# Altium PCB PCB - Rectangular.PcbDoc (part 2 of 2)
Units mm, origin at the board's own origin, x right, y up, seen from the top; angles counter-clockwise.
Board outline 0.38 x 0.39 mm, 6 copper layers (Top Layer, Layer 1, Layer 3, Layer 4, Layer 2, Bottom Layer), stack 1.211 mm thick; 158 components, 103 nets, 435 pads, 0 vias.
Unrouted connection lines stored in the file: 282.
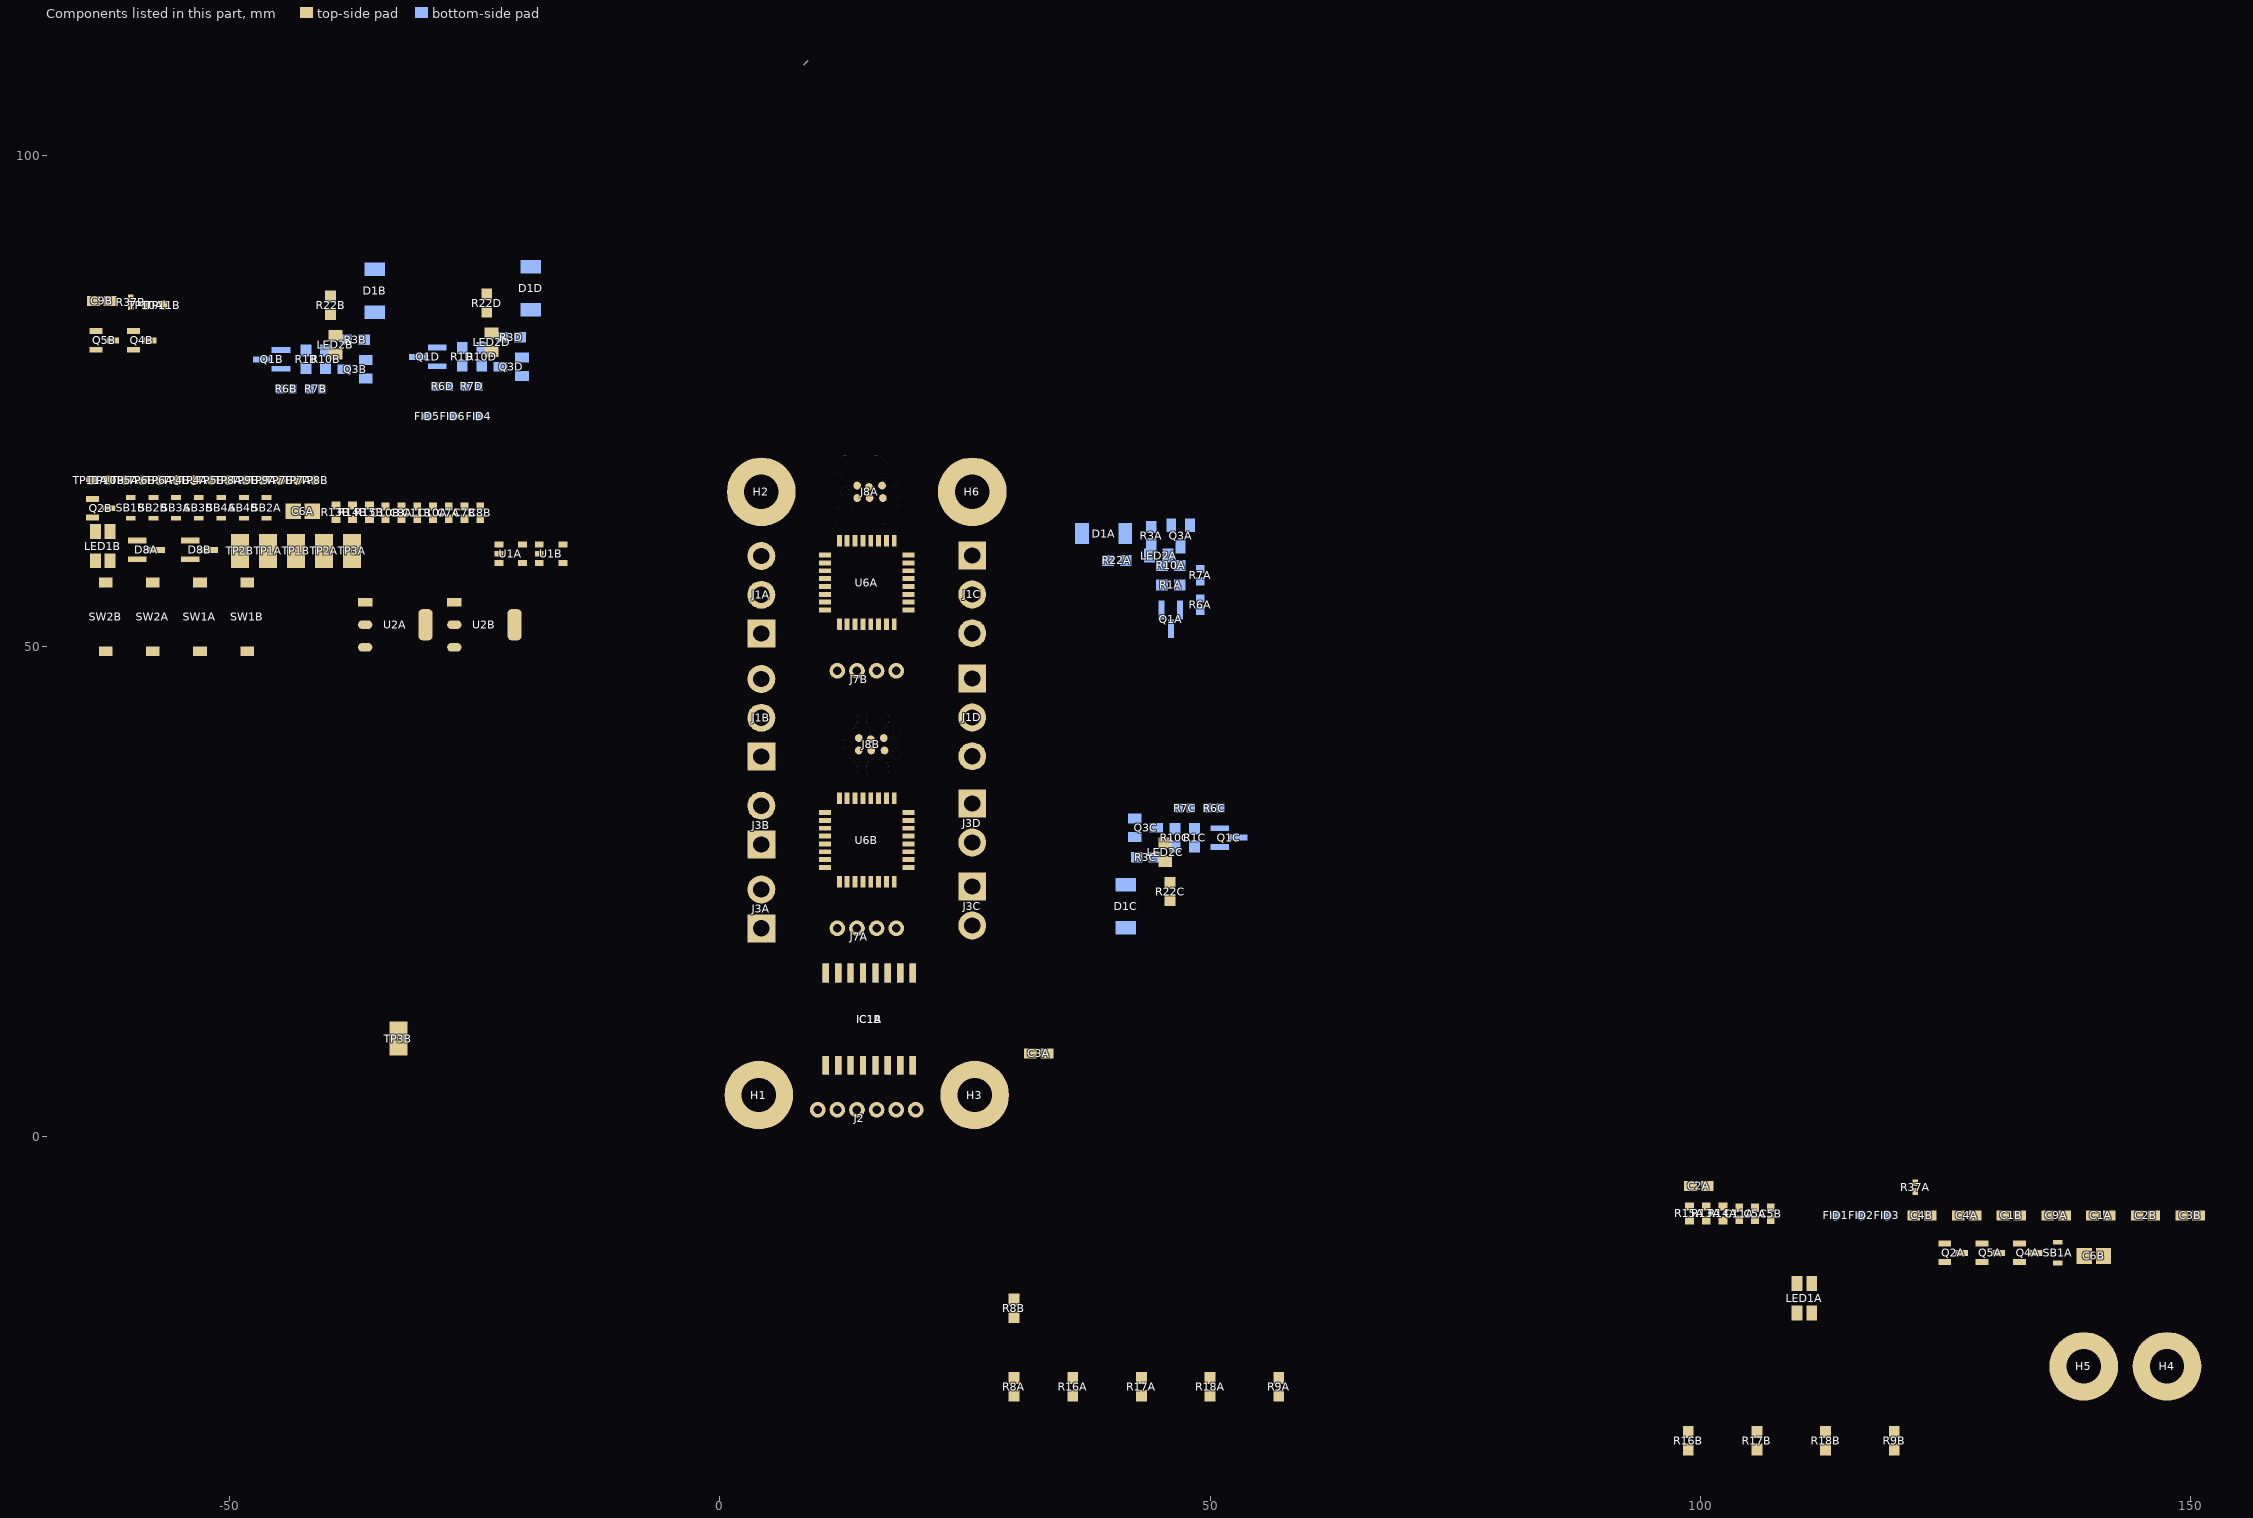
[diagram p2: the components of this part, seen from the top]

## Nets (pads, with @x,y where several pads share a name; then routed paths per layer and width w, separated by ;. In a path a pad name is that pad's centre, name@x,y a point inside that pad or via, vN(x,y) a via of type N, cw(c..) or ccw(c..) an arc to the next point about the centre after c; other vN are vias at no path point) (continued)
copper on no net: | length 159
  Top Layer w1: 74.875,83.525 78.563,82.555 ; 75.7,91.075 80.025,90.85
  Top Layer w2: 42.871,83.088 42.57,83.182 cw(c42.944,84.379) 42.547,83.189 42.265,83.283 cw(c42.661,84.473) 42.229,83.296 41.485,83.569 cw(c41.917,84.746) 41.464,83.577 41.002,83.756 cw(c41.455,84.925) 40.973,83.768 40.521,83.956 cw(c41.003,85.114) 40.509,83.961 39.916,84.215 cw(c40.409,85.368) 39.877,84.233 39.274,84.515 cw(c39.807,85.651) 39.23,84.537 38.411,84.961 cw(c38.987,86.075) 38.403,84.965 38.045,85.153 cw(c38.629,86.263) 38.016,85.169 37.158,85.65 cw(c37.772,86.744) 37.147,85.656 36.704,85.911 cw(c37.329,86.998) 36.664,85.935 36.513,86.029 cw(c37.178,87.092) 36.498,86.038 35.914,86.415 cw(c36.594,87.469) 35.909,86.419 35.475,86.701 cw(c36.16,87.752) 35.456,86.714 34.929,87.072 cw(c35.633,88.11) 34.904,87.089 34.508,87.372 cw(c35.237,88.392) 34.487,87.388 33.667,88 cw(c34.418,89.005) 33.628,88.031 32.733,88.756 cw(c33.523,89.73) 32.709,88.776 32.201,89.209 cw(c33.014,90.164) 32.198,89.211 32.066,89.324 cw(c32.882,90.277) 32.043,89.344 31.855,89.514 31.666,89.684 cw(c32.505,90.616) 31.658,89.691 31.432,89.899 cw(c32.279,90.823) 31.426,89.904 31.162,90.149 cw(c32.015,91.068) 31.158,90.152 30.866,90.425 cw(c31.723,91.341) 30.836,90.454 29.932,91.359 cw(c30.819,92.246) 29.909,91.382 29.551,91.759 cw(c30.461,92.622) 29.546,91.765 29.263,92.066 cw(c30.178,92.924) 28.968,92.594 28.94,92.698 cw(c30.15,93.028) 28.996,93.52 29.025,93.588 cw(c30.178,93.094) 29.472,94.13 30.104,94.561 30.122,94.573 cw(c30.828,93.536) 30.143,94.587 30.576,94.869 cw(c31.261,93.819) 30.63,94.902 31.082,95.166 cw(c31.714,94.083) 31.099,95.176 31.702,95.515 cw(c32.317,94.422) 31.708,95.518 31.877,95.612 cw(c32.486,94.516) 31.894,95.622 32.949,96.187 cw(c33.541,95.081) 33.011,96.218 33.576,96.482 cw(c34.107,95.345) 33.588,96.487 33.795,96.581 cw(c34.314,95.439) 33.807,96.586 34.617,96.944 cw(c35.124,95.797) 34.642,96.955 35.094,97.143 cw(c35.576,95.986) 35.136,97.16 35.89,97.443 cw(c36.33,96.269) 35.902,97.447 36.316,97.598 cw(c36.745,96.419) 36.323,97.6 36.587,97.694 cw(c37.008,96.513) 36.591,97.696 36.911,97.809 cw(c37.329,96.627) 36.955,97.823 37.256,97.918 cw(c37.63,96.721) 37.261,97.919 37.506,97.995 cw(c37.875,96.796) 37.521,97.999 38.803,98.376 cw(c39.156,97.173) 39.032,98.421 cw(c39.477,97.248) 39.173,98.465 39.249,98.484 cw(c39.552,97.267) 39.334,98.502 39.342,98.503 cw(c39.816,97.343) 39.639,98.584 39.673,98.589 39.681,98.592 cw(c40.146,97.427) 39.88,98.653 40.794,98.851 cw(c41.06,97.625) 40.804,98.853 41.256,98.947 cw(c41.512,97.719) 41.294,98.954 42.255,99.124 cw(c42.473,97.889) 42.29,99.13 42.864,99.214 cw(c43.047,97.974) 42.884,99.217 43.6,99.311 cw(c43.763,98.068) 43.648,99.317 44.665,99.411 cw(c44.781,98.162) 44.731,99.415 45.202,99.434 46.164,99.472 cw(c46.213,98.219) 46.184,99.472 46.589,99.482 cw(c46.618,98.228) 46.657,99.482 47.881,99.444 cw(c47.843,98.19) 47.977,99.437 48.144,99.419 ; 42.872,83.087 43.447,82.908 ccw(c43.82,84.106) 43.49,82.896 43.801,82.811 ccw(c44.131,84.021) 43.819,82.806 44.554,82.618 ccw(c44.866,83.832) 44.597,82.608 44.983,82.523 ccw(c45.252,83.748) 45.006,82.518 45.901,82.339 ccw(c46.147,83.569) 46.009,82.322 46.142,82.307 ; 49.472,81.85 50.329,81.765 ccw(c50.453,83.013) 50.336,81.764 51.147,81.689 ccw(c51.263,82.937) 51.149,81.689 51.358,81.67 ccw(c51.47,82.919) 51.376,81.668 52.374,81.593 ccw(c52.469,82.843) 52.382,81.592 53.738,81.498 ccw(c53.825,82.749) 53.774,81.496 54.463,81.468 54.465,81.468 cw(c54.38,79.469) 54.531,81.464 55.313,81.404 ccw(c55.408,82.655) 55.341,81.403 57.093,81.308 ccw(c57.161,82.561) 57.095,81.308 60.176,81.148 ccw(c60.241,82.4) 60.213,81.147 63.269,81.077 ccw(c63.314,83.077) 63.362,81.077 ; 51.412,99.061 51.491,99.054 cw(c51.395,97.804) 51.572,99.046 52.297,98.942 cw(c52.12,97.701) 52.338,98.935 54.42,98.568 cw(c54.202,97.333) 54.433,98.566 55.338,98.396 cw(c55.107,97.164) 55.343,98.395 56.766,98.122 cw(c56.529,96.89) 56.78,98.119 57.703,97.931 cw(c57.453,96.702) 57.709,97.929 58.566,97.75 59.782,97.496 cw(c59.525,96.269) 59.784,97.495 61.122,97.213 cw(c60.863,95.986) 61.124,97.213 63.253,96.76 cw(c62.992,95.534) 63.267,96.757 63.729,96.654 cw(c63.454,95.43) 63.732,96.653 65.327,96.331 cw(c65.216,95.081) 65.599,96.276 65.714,96.252 69.431,98.817 cw(c70.143,97.785) 69.44,98.824 69.732,99.021 cw(c70.435,97.983) 69.753,99.035 70.45,99.487 cw(c71.132,98.435) 70.459,99.493 70.874,99.757 cw(c71.547,98.699) 70.938,99.795 71.277,99.984 cw(c71.886,98.888) 71.739,100.133 72.06,100.171 cw(c72.206,98.925) 72.249,100.179 72.306,100.177 72.796,100.16 cw(c72.753,98.906) 72.943,100.146 73.188,100.108 cw(c72.998,98.869) 73.238,100.099 74.105,99.93 cw(c73.864,98.699) 74.152,99.92 74.472,99.844 cw(c74.185,98.624) 74.491,99.84 75.65,99.548 cw(c75.344,98.332) 75.656,99.546 75.986,99.461 cw(c75.673,98.247) 76.009,99.455 76.348,99.361 cw(c76.012,98.153) 76.351,99.36 77.293,99.097 cw(c76.955,97.889) 77.308,99.092 77.629,98.998 cw(c77.275,97.795) 77.632,98.997 78.838,98.639 cw(c78.481,97.437) 79.042,98.558 79.23,98.464 cw(c78.669,97.343) 79.556,98.229 79.584,98.201 cw(c78.698,97.314) 79.701,98.067 79.757,97.991 cw(c78.754,97.239) 79.971,97.543 79.989,97.468 cw(c78.773,97.164) 79.943,96.713 79.896,96.591 cw(c78.726,97.041) 79.879,96.548 79.85,96.481 cw(c78.698,96.975) 79.709,96.234 79.605,96.092 cw(c78.594,96.834) 79.542,96.012 79.174,95.589 cw(c78.226,96.41) 79.113,95.523 78.831,95.24 78.482,94.892 cw(c77.595,95.779) 78.344,94.772 77.993,94.422 cw(c77.105,95.308) 77.854,94.301 77.766,94.214 cw(c76.879,95.1) 77.737,94.186 cw(c76.823,95.044) 77.571,94.038 77.39,93.857 cw(c76.502,94.742) 77.351,93.819 cw(c76.427,94.667) 77.175,93.661 76.768,93.254 cw(c75.881,94.139) 76.724,93.211 cw(c75.796,94.055) 76.544,93.048 76.529,93.033 cw(c75.523,93.781) 76.366,92.853 cw(c75.438,93.696) 76.354,92.841 80.599,92.622 cw(c80.535,91.369) 80.688,92.614 81.376,92.529 cw(c81.222,91.285) 81.445,92.519 82.02,92.415 cw(c81.797,91.181) 82.055,92.408 82.413,92.333 cw(c82.155,91.106) 82.491,92.314 82.83,92.22 cw(c82.494,91.011) 82.87,92.208 83.2,92.104 cw(c82.824,90.908) 83.221,92.097 83.475,92.013 cw(c83.078,90.823) 83.549,91.985 ccw(c84.293,93.842) 83.672,91.941 cw(c83.286,90.748) 83.674,91.94 cw(c83.286,90.748) 83.73,91.92 84.004,91.816 cw(c83.559,90.644) 84.032,91.805 84.286,91.702 cw(c83.813,90.54) 84.307,91.693 84.439,91.636 cw(c83.945,90.484) 84.464,91.625 84.879,91.437 cw(c84.36,90.295) 84.885,91.434 85.13,91.321 cw(c84.605,90.182) 85.191,91.291 85.352,91.206 cw(c84.765,90.098) 85.367,91.198 85.866,90.924 cw(c85.264,89.824) 85.873,90.921 86.043,90.826 cw(c85.434,89.73) 86.096,90.795 86.793,90.362 cw(c86.131,89.297) 86.837,90.333 87.252,90.05 cw(c86.545,89.014) 87.298,90.017 87.449,89.904 87.524,89.848 cw(c86.772,88.845) 87.53,89.843 88.001,89.485 cw(c87.243,88.487) 88.045,89.45 88.271,89.261 cw(c87.469,88.298) 88.296,89.24 88.918,88.694 cw(c88.091,87.752) 88.977,88.638 89.175,88.441 89.439,88.177 cw(c88.552,87.29) 89.467,88.148 89.75,87.846 ; 63.367,81.078 63.362,81.077 ; 89.75,87.845 91.126,86.376 cw(c90.21,85.519) 91.464,85.476 91.454,85.202 cw(c90.201,85.246) 91.022,84.298 90.74,84.053 cw(c89.918,85.001) 90.702,84.021 90.607,83.946 cw(c89.824,84.925) 90.495,83.866 90.318,83.754 89.93,83.508 cw(c89.259,84.567) 89.913,83.497 89.573,83.29 cw(c88.92,84.36) 89.565,83.285 89.471,83.228 cw(c88.825,84.303) 89.443,83.212 88.444,82.647 cw(c87.827,83.738) 88.413,82.63 88.093,82.46 cw(c87.506,83.569) 88.067,82.447 87.69,82.259 cw(c87.13,83.38) 87.644,82.237 87.267,82.067 cw(c86.753,83.211) 87.242,82.056 86.621,81.792 cw(c86.131,82.947) 86.577,81.775 85.786,81.474 cw(c85.34,82.645) 85.736,81.456 85.51,81.38 cw(c85.113,82.57) 85.487,81.373 85.186,81.279 cw(c84.812,82.476) 85.148,81.268 84.469,81.079 cw(c84.134,82.287) 84.424,81.067 84.028,80.973 cw(c83.738,82.193) 83.994,80.965 83.541,80.871 cw(c83.286,82.099) 83.504,80.864 83.183,80.807 cw(c82.965,82.042) 83.143,80.801 82.351,80.688 cw(c82.174,81.929) 82.24,80.677 81.524,80.639 cw(c81.458,81.892) 81.504,80.639 80.975,80.62 cw(c80.93,81.873) 80.903,80.619 80.109,80.638 cw(c80.139,81.892) 80.067,80.64 79.408,80.677 cw(c79.479,81.929) 79.314,80.686 78.332,80.817 cw(c78.563,82.555) 78.117,80.859 74.975,81.685 74.877,81.674 74.642,81.638 74.718,81.506 cw(c73.629,80.884) 74.754,81.438 76.11,78.687 cw(c74.986,78.133) 76.112,78.684 76.545,77.798 cw(c75.419,77.247) 76.583,77.713 76.621,77.618 cw(c75.457,77.153) 76.706,77.049 76.687,76.823 cw(c75.438,76.927) 76.324,76.04 76.259,75.974 cw(c75.372,76.861) 76.124,75.857 76.049,75.801 cw(c75.296,76.804) 75.762,75.64 75.668,75.602 cw(c75.202,76.766) 75.202,75.512 74.447,75.512 69.587,75.512 cw(c69.587,76.766) 69.521,75.514 69.163,75.533 cw(c69.229,76.785) 68.894,75.577 68.554,75.671 cw(c68.89,76.88) 68.396,75.727 68.198,75.812 cw(c68.692,76.964) 68.083,75.868 67.914,75.962 cw(c68.523,77.059) 67.814,76.024 67.635,76.146 cw(c68.344,77.181) 67.574,76.191 67.404,76.323 cw(c68.174,77.313) 67.371,76.35 67.258,76.444 67.145,76.538 cw(c67.948,77.501) 67.061,76.615 66.92,76.756 cw(c67.807,77.643) 66.879,76.799 66.502,77.214 cw(c67.43,78.057) 66.498,77.218 66.328,77.407 cw(c67.26,78.246) 66.297,77.443 66.203,77.556 65.92,77.895 65.826,78.008 cw(c66.789,78.811) 65.81,78.028 65.734,78.122 cw(c66.714,78.905) 65.724,78.135 65.46,78.474 cw(c66.45,79.244) 65.447,78.492 64.09,80.301 cw(c65.093,81.053) 64.036,80.378 cw(c64.98,81.204) 63.964,80.469 cw(c64.905,81.298) 63.896,80.553 cw(c64.811,81.411) 63.795,80.676 cw(c64.735,81.505) 63.726,80.76 cw(c64.641,81.618) 63.632,80.874 cw(c64.547,81.731) 63.54,80.983 cw(c64.434,81.863) 63.492,81.036 63.362,81.077

## Other copper
Top Layer:
  region: 379 vertices and 0 holes, not listed, extent 78.095,81.873 90.21,91.388
  region: 964 vertices and 1 holes, not listed, extent 30.15,76.766 78.773,98.925
  region: 8.596,109.292 8.693,109.393 8.789,109.493 8.882,109.59 8.974,109.685

## Silkscreen, mask and mechanical layers (free items; w line width, h text height)
Board:
  drawing of 3378 lines, arcs and shapes, not listed
Top Assembly (Mech5):
  drawing of 71 lines, arcs and shapes, not listed
  text "1" at -251.917,172.192 h3.81
  text "2" at -194.692,172.192 h3.81
  text "3" at -139.241,172.192 h3.81
  text "7" at 102.968,172.192 h3.81
  text "8" at 161.08,172.192 h3.81
  text "9" at 218.305,172.192 h3.81
  text "6" at 43.276,171.952 h3.81
  text "5" at -14.795,171.821 h3.81
  text "10" at 274.643,171.749 h3.81
  text "4" at -74.918,171.305 h3.81
  text "A" at 309.492,146.2 h3.81
  text "A" at -278.414,146.152 h3.81
  text "B" at 309.492,94.775 h3.81
  text "B" at -278.414,94.727 h3.81
  text "C" at 309.802,44.588 h3.81
  text "C" at -278.104,44.54 h3.81
  text "ASSEMBLY DRAWING NOTES: /  / 1. THE PCB ASSEMBLY SHALL BE COMPLIANT WITH THE ROHS2 DIRECTIVE 2011/65/EU. THIS SHALL INCLUDE, AT A MINIMUM, ALL THE CONSTITUENT MATERIALS AND ANY OTHER ADDITIVES THAT MAY BE INCLUDED OR TRANSFERRED INTO THE FINAL PRODUCT DURING THE MANUFACTURING PROCESS. THE SUPPLIER OF THIS PCB ASSEMBLY SHALL BE ABLE TO PROVIDE DOCUMENTATION UPON REQUEST DEMONSTRATING COMPLIANCE TO THE DIRECTIVE. /       / 2. ASSEMBLY SHALL BE ACCEPTABLE AND REJECTABLE AND INSPECTED TO IPC-A-610, CLASS 2. /  / 3. REWORK, REPAIR, OR MODIFICATIONS MUST COMPLY WITH IPC-7711 AND IPC-7721 CLASS 2. /  / 4. EXCEPTIONS TO NOTE 3: LIFTED LAND REPAIR, LAND REPAIR, LIFTED CONDUCTORS, AND PAD REPAIR IS NOT ACCEPTABLE. /  / 5. EACH LOT SHALL HAVE A CERTIFICATE OF COMPLIANCE TO CERTIFY THAT MATERIALS SPECIFIED ON THE BILL OF MATERIALS HAVE BEEN USED AND THAT THE ASSEMBLY HAS BEEN ASSEMBLED IN COMPLIANCE WITH THE AGREED QUALITY PLAN. /  / 6. THE ASSEMBLY SHALL BE LEGIBLY IDENTIFIED USING NON-CONDUCTIVE EPOXY INK OR A NON-CONDUCTIVE PERMANENT LABEL LOCATED IN THE AREA(S) INDICATED. THE IDENTIFIERS SHALL CONSIST OF THE MBI NUMBER (INCLUDING REVISION) AND THE BOARD'S SERIAL NUMBER (TO BE GENERATED BY THE ASSEMBLER). IF THIS ASSEMBLY DRAWING SHOWS THE LOCATION IS OFF THE BOARD, THE LABEL SHOULD BE PLACED ON A TAG THAT IS ATTACHED TO THE BOARD. /  / 7. COMPONENTS WITH PIN ONE DESIGNATOR OR POLARIZATION MARKINGS SHALL BE PLACED AS INDICATED ON THE ASSEMBLY DRAWING. /  / 8. APPROPRIATE ESD PRECAUTIONS SHALL BE USED WHILE BUILDING OR HANDLING THIS ASSEMBLY. /  / 9. COMPONENT LEADS IN PLATED-THROUGH HOLES SHALL BE TRIMMED TO EXTEND NO GREATER THAN 1.8 MM FROM THE PLATING SURFACE." at -240,5 h2
  text "D" at 309.802,-11.484 h3.81
  text "D" at -278.104,-11.532 h3.81
  text "E" at 309.492,-61.361 h3.81
  text "E" at -278.414,-61.409 h3.81
  text "F" at 310.111,-113.096 h3.81
  text "F" at -277.794,-113.144 h3.81
  text "G" at 309.802,-166.071 h3.81
  text "G" at -278.104,-166.119 h3.81
  text "H" at 309.492,-219.045 h3.81
  text "H" at -278.414,-219.093 h3.81
  text "P" at -214.85,-224.15 h2.33
  text "r" at -213.65,-224.15 h2.33
  text "o" at -212.9,-224.15 h2.33
  text "j" at -211.85,-224.15 h2.33
  text "e" at -211.25,-224.15 h2.33
  text "c" at -210.35,-224.15 h2.33
  text "t" at -209.45,-224.15 h2.33
  text "S" at -208.55,-224.15 h2.33
  text "u" at -207.35,-224.15 h2.33
  text "n" at -206.3,-224.15 h2.33
  text "r" at -205.25,-224.15 h2.33
  text "i" at -204.5,-224.15 h2.33
  text "d" at -203.9,-224.15 h2.33
  text "e" at -203,-224.15 h2.33
  text "Copyright" at 141.3,-224.424 h2.5
  text ".a_CopyrightDate" at 151.8,-224.424 h2.5
  text "Drawing No:" at 173.3,-224.924 h3
  text ".a_AssemDwgNo" at 188.8,-224.924 h4
  text "Title:" at 238.3,-224.924 h3
  text ".a_Title" at 245.3,-224.924 h4
  text "T" at -214.25,-226.4 h2.33
  text "h" at -213.05,-226.4 h2.33
  text "e" at -212,-226.4 h2.33
  text "D" at -210.65,-226.4 h2.33
  text "i" at -209.15,-226.4 h2.33
  text "a" at -208.55,-226.4 h2.33
  text "m" at -207.65,-226.4 h2.33
  text "o" at -206,-226.4 h2.33
  text "n" at -204.95,-226.4 h2.33
  text "d" at -203.9,-226.4 h2.33
  text "UNLESS OTHERWISE SPECIFIED / DIMENSONS AND TOLLERANCES ARE IN / mm AND APPLY TO FINISHED PART" at 85.293,-228.599 h1.52
  text "3" at -216.5,-228.8 h2.33
  text "2" at -215.45,-228.8 h2.33
  text "L" at -213.95,-228.8 h2.33
  text "e" at -212.75,-228.8 h2.33
  text "a" at -211.85,-228.8 h2.33
  text "v" at -210.95,-228.8 h2.33
  text "y" at -209.9,-228.8 h2.33
  text "g" at -208.85,-228.8 h2.33
  text "r" at -207.8,-228.8 h2.33
  text "e" at -207.05,-228.8 h2.33
  text "a" at -206.15,-228.8 h2.33
  text "v" at -205.25,-228.8 h2.33
  text "e" at -204.2,-228.8 h2.33
  text "R" at -202.85,-228.8 h2.33
  text "d" at -201.5,-228.8 h2.33
  text "Altium Designer" at 141.3,-229.424 h2.5
  text ".a_AltiumVer" at 157.8,-229.424 h2.5
  text "Changed by:" at 173.3,-229.424 h2.5
  text ".a_PcbRevAuthor" at 186.3,-229.424 h3
  text "Change Date:" at 208.8,-229.424 h2.5
  text ".a_PcbRevDate" at 222.3,-229.424 h2.5
  text "Top Assembly" at 238.2,-229.949 h4
  text "B" at -217.1,-231.05 h2.33
  text "r" at -215.75,-231.05 h2.33
  text "o" at -215,-231.05 h2.33
  text "o" at -213.95,-231.05 h2.33
  text "m" at -212.9,-231.05 h2.33
  text "h" at -211.25,-231.05 h2.33
  text "a" at -210.2,-231.05 h2.33
  text "l" at -209.3,-231.05 h2.33
  text "l" at -208.7,-231.05 h2.33
  text "," at -208.1,-231.05 h2.33
  text "S" at -207.2,-231.05 h2.33
  text "h" at -206,-231.05 h2.33
  text "e" at -204.95,-231.05 h2.33
  text "f" at -204.05,-231.05 h2.33
  text "f" at -203.3,-231.05 h2.33
  text "i" at -202.55,-231.05 h2.33
  text "e" at -201.95,-231.05 h2.33
  text "l" at -201.2,-231.05 h2.33
  text "d" at -200.75,-231.05 h2.33
  text "TOLLERANCES ON:" at 98.993,-231.299 h1.52
  text "U" at -215.45,-233.3 h2.33
  text "n" at -213.95,-233.3 h2.33
  text "i" at -212.9,-233.3 h2.33
  text "t" at -212.3,-233.3 h2.33
  text "e" at -211.7,-233.3 h2.33
  text "d" at -210.8,-233.3 h2.33
  text "K" at -209.45,-233.3 h2.33
  text "i" at -207.95,-233.3 h2.33
  text "n" at -207.35,-233.3 h2.33
  text "g" at -206.3,-233.3 h2.33
  text "d" at -205.25,-233.3 h2.33
  text "o" at -204.2,-233.3 h2.33
  text "m" at -203.15,-233.3 h2.33
  text "Size A2" at 141.3,-234.424 h2.5
  text "Change Reason:" at 173.3,-234.424 h2.5
  text ".a_PcbRevReason" at 189.8,-234.424 h2.5
  text "Sheet 1 of 2" at 208.8,-234.424 h2.5
  text "Variant: '.a_Variant'" at 238,-235 h4
  text "S" at -211.7,-235.55 h2.33
  text "3" at -210.5,-235.55 h2.33
  text "7" at -209,-235.55 h2.33
  text "R" at -207.95,-235.55 h2.33
  text "D" at -206.6,-235.55 h2.33
  text "1 PLACE DEC. / +/- 0.15" at 80.293,-236.199 h1.52
  text "ANGLES / +/- 0.5 DEG." at 121.593,-236.199 h1.52
  text "2 PLACE DEC. / +/- 0.05" at 100.993,-236.299 h1.52
  text "THIS DRAWING REMAINS THE PROPERTY OF PROJECT SUNRIDE. / COPYRIGHT FOR ALL PURPOSES IS VESTED IN PROJECT SUNRIDE. / THE REPRODUCTION OF THIS DRAWING IN WHOLE OR IN PART IS PROHIBITED WITHOUT EXPRESS CONSENT IN WRITING. THIS DESIGN IS OFFERED FOR USE ONLY WITH EQUIPMENT MANUFACTURED OR SPECIFICALLY RECOMMENDED BY PROJECT SUNRIDE. RIGHTS ARE RESERVED TO MAKE A CHARGE FOR THE USE OF THIS DESIGN OR ANY PART THEREOF AND SUCH RIGHT SHALL SUBSIST UNLESS AND UNTIL THE SAME SHALL BE EXPRESSLY WAIVED IN WRITING. ACCEPTANCE OF THIS DRAWING WILL BE CONSTRUED AS AN ACCEPTANCE OF THESE CONDITIONS." at -174.207,-238.999 h1.52
  text "1" at -251.893,-240.91 h3.81
  text "2" at -194.668,-240.91 h3.81
  text "3" at -139.217,-240.91 h3.81
  text "7" at 102.992,-240.91 h3.81
  text "8" at 161.104,-240.91 h3.81
  text "9" at 218.329,-240.91 h3.81
  text "6" at 43.3,-241.15 h3.81
  text "5" at -14.771,-241.282 h3.81
  text "10" at 274.667,-241.353 h3.81
  text "4" at -74.894,-241.797 h3.81
Bottom Assembly:
  drawing of 71 lines, arcs and shapes, not listed
  text "9" at -184.307,172.194 h3.81
  text "8" at -127.082,172.194 h3.81
  text "7" at -68.97,172.194 h3.81
  text "3" at 173.239,172.194 h3.81
  text "2" at 228.69,172.194 h3.81
  text "1" at 285.915,172.194 h3.81
  text "6" at -9.279,171.954 h3.81
  text "5" at 48.792,171.823 h3.81
  text "10" at -240.645,171.751 h3.81
  text "4" at 108.916,171.307 h3.81
  text "A" at -275.494,146.202 h3.81
  text "A" at 312.412,146.154 h3.81
  text "B" at -275.494,94.777 h3.81
  text "B" at 312.412,94.729 h3.81
  text "C" at -275.804,44.59 h3.81
  text "C" at 312.102,44.542 h3.81
  text "ASSEMBLY DRAWING NOTES: /  / 1. THE PCB ASSEMBLY SHALL BE COMPLIANT WITH THE ROHS2 DIRECTIVE 2011/65/EU. THIS SHALL INCLUDE, AT A MINIMUM, ALL THE CONSTITUENT MATERIALS AND ANY OTHER ADDITIVES THAT MAY BE INCLUDED OR TRANSFERRED INTO THE FINAL PRODUCT DURING THE MANUFACTURING PROCESS. THE SUPPLIER OF THIS PCB ASSEMBLY SHALL BE ABLE TO PROVIDE DOCUMENTATION UPON REQUEST DEMONSTRATING COMPLIANCE TO THE DIRECTIVE. /       / 2. ASSEMBLY SHALL BE ACCEPTABLE AND REJECTABLE AND INSPECTED TO IPC-A-610, CLASS 2. /  / 3. REWORK, REPAIR, OR MODIFICATIONS MUST COMPLY WITH IPC-7711 AND IPC-7721 CLASS 2. /  / 4. EXCEPTIONS TO NOTE 3: LIFTED LAND REPAIR, LAND REPAIR, LIFTED CONDUCTORS, AND PAD REPAIR IS NOT ACCEPTABLE. /  / 5. EACH LOT SHALL HAVE A CERTIFICATE OF COMPLIANCE TO CERTIFY THAT MATERIALS SPECIFIED ON THE BILL OF MATERIALS HAVE BEEN USED AND THAT THE ASSEMBLY HAS BEEN ASSEMBLED IN COMPLIANCE WITH THE AGREED QUALITY PLAN. /  / 6. THE ASSEMBLY SHALL BE LEGIBLY IDENTIFIED USING NON-CONDUCTIVE EPOXY INK OR A NON-CONDUCTIVE PERMANENT LABEL LOCATED IN THE AREA(S) INDICATED. THE IDENTIFIERS SHALL CONSIST OF THE MBI NUMBER (INCLUDING REVISION) AND THE BOARD'S SERIAL NUMBER (TO BE GENERATED BY THE ASSEMBLER). IF THIS ASSEMBLY DRAWING SHOWS THE LOCATION IS OFF THE BOARD, THE LABEL SHOULD BE PLACED ON A TAG THAT IS ATTACHED TO THE BOARD. /  / 7. COMPONENTS WITH PIN ONE DESIGNATOR OR POLARIZATION MARKINGS SHALL BE PLACED AS INDICATED ON THE ASSEMBLY DRAWING. /  / 8. APPROPRIATE ESD PRECAUTIONS SHALL BE USED WHILE BUILDING OR HANDLING THIS ASSEMBLY. /  / 9. COMPONENT LEADS IN PLATED-THROUGH HOLES SHALL BE TRIMMED TO EXTEND NO GREATER THAN 1.8 MM FROM THE PLATING SURFACE." at 273.998,5.002 h2
  text "D" at -275.804,-11.482 h3.81
  text "D" at 312.102,-11.53 h3.81
  text "E" at -275.494,-61.359 h3.81
  text "E" at 312.412,-61.407 h3.81
  text "Place Serial Number QR code label where indicated. / QR code format = xxxxxx-yyyyyy / Where xxxxxx is the works order number, and yyyyyy is an incrementing item number starting from 1. / Text below QR code should show the QR code data, along with the Master Build Instruction number and revision." at 116.5,-82.1 h2
  text "F" at -276.114,-113.094 h3.81
  text "F" at 311.792,-113.142 h3.81
  text "G" at -275.804,-166.069 h3.81
  text "G" at 312.102,-166.117 h3.81
  text "H" at -275.494,-219.043 h3.81
  text "H" at 312.412,-219.091 h3.81
  text "e" at 239,-224.15 h2.33
  text "d" at 239.9,-224.15 h2.33
  text "i" at 240.5,-224.15 h2.33
  text "r" at 241.25,-224.15 h2.33
  text "n" at 242.3,-224.15 h2.33
  text "u" at 243.35,-224.15 h2.33
  text "S" at 244.55,-224.15 h2.33
  text "t" at 245.45,-224.15 h2.33
  text "c" at 246.35,-224.15 h2.33
  text "e" at 247.25,-224.15 h2.33
  text "j" at 247.85,-224.15 h2.33
  text "o" at 248.9,-224.15 h2.33
  text "r" at 249.65,-224.15 h2.33
  text "P" at 250.85,-224.15 h2.33
  text ".a_CopyrightDate" at -117.802,-224.422 h2.5
  text "Copyright" at -107.302,-224.422 h2.5
  text ".a_Title" at -211.302,-224.922 h4
  text "Title:" at -204.302,-224.922 h3
  text ".a_AssemDwgNo" at -154.802,-224.922 h4
  text "Drawing No:" at -139.302,-224.922 h3
  text "d" at 239.9,-226.4 h2.33
  text "n" at 240.95,-226.4 h2.33
  text "o" at 242,-226.4 h2.33
  text "m" at 243.65,-226.4 h2.33
  text "a" at 244.55,-226.4 h2.33
  text "i" at 245.15,-226.4 h2.33
  text "D" at 246.65,-226.4 h2.33
  text "e" at 248,-226.4 h2.33
  text "h" at 249.05,-226.4 h2.33
  text "T" at 250.25,-226.4 h2.33
  text "UNLESS OTHERWISE SPECIFIED / DIMENSONS AND TOLLERANCES ARE IN / mm AND APPLY TO FINISHED PART" at -51.296,-228.597 h1.52
  text "d" at 237.5,-228.8 h2.33
  text "R" at 238.85,-228.8 h2.33
  text "e" at 240.2,-228.8 h2.33
  text "v" at 241.25,-228.8 h2.33
  text "a" at 242.15,-228.8 h2.33
  text "e" at 243.05,-228.8 h2.33
  text "r" at 243.8,-228.8 h2.33
  text "g" at 244.85,-228.8 h2.33
  text "y" at 245.9,-228.8 h2.33
  text "v" at 246.95,-228.8 h2.33
  text "a" at 247.85,-228.8 h2.33
  text "e" at 248.75,-228.8 h2.33
  text "L" at 249.95,-228.8 h2.33
  text "2" at 251.45,-228.8 h2.33
  text "3" at 252.5,-228.8 h2.33
  text ".a_PcbRevDate" at -188.302,-229.422 h2.5
  text "Change Date:" at -174.802,-229.422 h2.5
  text ".a_PcbRevAuthor" at -152.302,-229.422 h3
  text "Changed by:" at -139.302,-229.422 h2.5
  text ".a_AltiumVer" at -123.802,-229.422 h2.5
  text "Altium Designer" at -107.302,-229.422 h2.5
  text "Bottom Assembly" at -204.202,-229.947 h4
  text "d" at 236.75,-231.05 h2.33
  text "l" at 237.2,-231.05 h2.33
  text "e" at 237.95,-231.05 h2.33
  text "i" at 238.55,-231.05 h2.33
  text "f" at 239.3,-231.05 h2.33
  text "f" at 240.05,-231.05 h2.33
  text "e" at 240.95,-231.05 h2.33
  text "h" at 242,-231.05 h2.33
  text "S" at 243.2,-231.05 h2.33
  text "," at 244.1,-231.05 h2.33
  text "l" at 244.7,-231.05 h2.33
  text "l" at 245.3,-231.05 h2.33
  text "a" at 246.2,-231.05 h2.33
  text "h" at 247.25,-231.05 h2.33
  text "m" at 248.9,-231.05 h2.33
  text "o" at 249.95,-231.05 h2.33
  text "o" at 251,-231.05 h2.33
  text "r" at 251.75,-231.05 h2.33
  text "B" at 253.1,-231.05 h2.33
  text "TOLLERANCES ON:" at -64.995,-231.297 h1.52
  text "m" at 239.15,-233.3 h2.33
  text "o" at 240.2,-233.3 h2.33
  text "d" at 241.25,-233.3 h2.33
  text "g" at 242.3,-233.3 h2.33
  text "n" at 243.35,-233.3 h2.33
  text "i" at 243.95,-233.3 h2.33
  text "K" at 245.45,-233.3 h2.33
  text "d" at 246.8,-233.3 h2.33
  text "e" at 247.7,-233.3 h2.33
  text "t" at 248.3,-233.3 h2.33
  text "i" at 248.9,-233.3 h2.33
  text "n" at 249.95,-233.3 h2.33
  text "U" at 251.45,-233.3 h2.33
  text "Sheet 2 of 2" at -174.802,-234.422 h2.5
  text ".a_PcbRevReason" at -155.802,-234.422 h2.5
  text "Change Reason:" at -139.302,-234.422 h2.5
  text "Size A2" at -107.302,-234.422 h2.5
  text "Variant: '.a_Variant'" at -204.002,-234.998 h4
  text "D" at 242.6,-235.55 h2.33
  text "R" at 243.95,-235.55 h2.33
  text "7" at 245,-235.55 h2.33
  text "3" at 246.5,-235.55 h2.33
  text "S" at 247.7,-235.55 h2.33
  text "ANGLES / +/- 0.5 DEG." at -87.595,-236.197 h1.52
  text "1 PLACE DEC. / +/- 0.15" at -46.296,-236.197 h1.52
  text "2 PLACE DEC. / +/- 0.05" at -66.995,-236.297 h1.52
  text "THIS DRAWING REMAINS THE PROPERTY OF PROJECT SUNRIDE. / COPYRIGHT FOR ALL PURPOSES IS VESTED IN PROJECT SUNRIDE. / THE REPRODUCTION OF THIS DRAWING IN WHOLE OR IN PART IS PROHIBITED WITHOUT EXPRESS CONSENT IN WRITING. THIS DESIGN IS OFFERED FOR USE ONLY WITH EQUIPMENT MANUFACTURED OR SPECIFICALLY RECOMMENDED BY PROJECT SUNRIDE. RIGHTS ARE RESERVED TO MAKE A CHARGE FOR THE USE OF THIS DESIGN OR ANY PART THEREOF AND SUCH RIGHT SHALL SUBSIST UNLESS AND UNTIL THE SAME SHALL BE EXPRESSLY WAIVED IN WRITING. ACCEPTANCE OF THIS DRAWING WILL BE CONSTRUED AS AN ACCEPTANCE OF THESE CONDITIONS." at 208.205,-238.997 h1.52
  text "9" at -184.331,-240.908 h3.81
  text "8" at -127.106,-240.908 h3.81
  text "7" at -68.994,-240.908 h3.81
  text "3" at 173.215,-240.908 h3.81
  text "2" at 228.666,-240.908 h3.81
  text "1" at 285.891,-240.908 h3.81
  text "6" at -9.302,-241.148 h3.81
  text "5" at 48.769,-241.28 h3.81
  text "10" at -240.669,-241.351 h3.81
  text "4" at 108.892,-241.795 h3.81
Drill Drawing:
  drawing of 89 lines, arcs and shapes, not listed
  text "1" at -252.01,172.191 h3.81
  text "2" at -194.785,172.191 h3.81
  text "3" at -139.334,172.191 h3.81
  text "7" at 102.875,172.191 h3.81
  text "8" at 160.987,172.191 h3.81
  text "9" at 218.212,172.191 h3.81
  text "6" at 43.183,171.951 h3.81
  text "5" at -14.888,171.819 h3.81
  text "10" at 274.55,171.748 h3.81
  text "4" at -75.011,171.304 h3.81
  text "A" at 309.399,146.199 h3.81
  text "A" at -278.507,146.151 h3.81
  text "B" at 309.399,94.773 h3.81
  text "B" at -278.507,94.725 h3.81
  text "C" at 309.708,44.587 h3.81
  text "C" at -278.197,44.539 h3.81
  text "D" at 309.708,-11.486 h3.81
  text "D" at -278.197,-11.534 h3.81
  text "E" at 309.399,-61.362 h3.81
  text "E" at -278.507,-61.41 h3.81
  text "PLEASE PLACE THE ELECTRICAL CHECK MARK (BBT) IN THIS AREA ON THE BOTTOM SILKSCREEN LAYER." at -91.8,-61.9 h2
  text "1.      ROHS / THE PCB SHALL BE COMPLIANT WITH THE EU ROHS2 DIRECTIVE 2011/65/EU. THIS SHALL INCLUDE, AT A MINIMUM, ALL THE CONSTITUENT MATERIALS AND ANY OTHER ADDITIVES THAT MAY BE INCLUDED OR TRANSFERRED INTO THE FINAL PRODUCT DURING THE MANUFACTURING PROCESS. THE SUPPLIER OF THIS PCB SHALL BE ABLE TO PROVIDE DOCUMENTATION UPON REQUEST DEMONSTRATING COMPLIANCE TO THE DIRECTIVE. /       / 2.      FLAMMABILITY / THE PCB MATERIALS AND CONSTRUCTION MUST MEET UL94V-0. /  / 3.      MATERIALS / SEE THE BOARD STACKUP TABLE FOR DETAILS.  / FINISHED PCB THICKNESS TO BE WITHIN +/- 10% OF THE TOTAL OF THE STACKUP TABLE. /  / 4.      IMPEDANCE CONTROL / SEE TABLE. /  / 5.      PLATING / COPPER THICKNESSES STATED IN STACKUP TABLE ARE FINISHED PLATED WEIGHTS. / HOLES TO BE PLATED THRU 0.025 MM MINIMUM COPPER. ALL VIAS TO BE RESIN FILLED & PLATED SHUT. /  / 6.      LINE THICKNESS / FINISHED LINE THICKNESS TO BE WITHIN +/- 10% OF GERBER DATA. /  / 7.      DRILLING / SEE DRILL TABLE. SIZES SHOWN ARE FINISHED HOLE SIZES. / MINIMUM ANNULAR RING REQUIREMENT IS 0.05 MM. / DRILL HOLE TANGENCY IS ACCEPTABLE BUT HOLE BREAK OUT SHALL NOT BE ACCEPTABLE. / HOLE LOCATION AND TOLERANCES ARE TO BE +/- 0.076 MM FROM DATUM (0.0-0.0). /  / 8.      QUALITY / BOARDS SHALL BE ACCEPTABLE AND REJECTABLE PER IPC-A-600 CLASS 2. /  / 9.      SOLDER MASK / CONSTRUCTION TO BE SOLDERMASK OVER BARE COPPER (SMOBC), USING LIQUID PHOTO-IMAGEABLE (LPI) SOLDERMASK TO MEET QUALIFICATIONS OF IPC-SM-840. / SOLDER MASK TO BE GREEN UNLESS OTHERWISE SPECIFIED ON PO. /  / 10.     SILKSCREEN LEGEND / WHITE. /  / 11.     FINISH / IMMERSION GOLD OVER ELECTROLESS NICKEL (ENIG). / COVERAGE AND SOLDERABILITY SHALL MEET IPC-4552. /  / 12.     MARKING / UL LOGO, UL94 V-0 TEXT, MANUFACTURER CODE AND DATE LEGEND TO BE ADDED IN POSITION INDICATED. /  / 13.     ROUTING / PCB WILL HAVE ROUTED EDGE; V-SCORING NOT ALLOWED.  / MINIMUM ROUTING RADIUS TO BE 0.75 MM. / BOARD ROUTING TOLERANCE TO BE +/- 0.2 MM. /  / 14.     ELECTRICAL TESTING / BARE BOARDS SHALL BE 100% ELECTRICAL TESTED FOR RESISTANCE AT 100 VOLTS MINIMUM, AND FOR AND CONTINUITY USING GERBER GENERATED NET LIST DATA.  / “BBT” (BARE BOARD TESTED) TO BE ADDED BY THE MANUFACTURER IN AREA INDICATED TO CERTIFY THAT THE BOARDS HAVE BEEN TESTED. /  / 15.     PACKAGING / BOARD TO BE VACUUM PACKED, SHIPPED AND IDENTIFIED WITH PART NUMBER, REVISION, AND DATE CODE MARKED ON THE PACKAGING. /  / 16.     PANELISATION / PANEL SIZE, BOARDS PER PANEL AND TOOLING RAILS / HOLES TO BE SPECIFIED BY PCB ASSEMBLER ON PURCHASE ORDER. /  / 17.     SOLDER PASTE STENCIL DATA / PLEASE SEND BACK TO US THE STEP AND REPEATED DATA FOR THE SOLDER PASTE STENCIL." at -260.1,-74 h2
  text "PLEASE PLACE THE UL LOGO, ETC. IN THIS AREA ON THE BOTTOM SILKSCREEN LAYER" at -91.8,-79.4 h2
  text "ENSURE BOARD CUTOUT IS INCORPORATED - SEE PANEL ROUTING LAYER" at 38.25,-92.425 h2
  text "Controlled Impedance Table" at 214.9,-95.9 h4
  text "Ref Layer" at 208.7,-100.8 h4
  text "Layer" at 175.9,-100.9 h4
  text "Width" at 186.9,-100.9 h4
  text "Gap" at 198.9,-100.9 h4
  text "Impedance" at 226.9,-100.9 h4
  text "Tollerance" at 246.9,-100.9 h4
  text "Dielectric Const" at 265.9,-100.9 h4
  text "1" at 179,-105.4 h4
  text "0.13" at 197.6,-105.6 h4
  text "2" at 214.3,-105.6 h4
  text "0.2" at 187,-105.7 h4
  text "90R Diff" at 229.1,-105.9 h4
  text "10%" at 251.9,-105.9 h4
  text "4" at 275.9,-105.9 h4
  text "1" at 179.1,-110.3 h4
  text "10%" at 251.864,-110.442 h4
  text "2" at 214.4,-110.5 h4
  text "50R" at 228.821,-110.521 h4
  text "-" at 197.6,-110.7 h4
  text "0.284" at 187,-110.8 h4
  text "4" at 275.9,-111 h4
  text "F" at 310.018,-113.097 h3.81
  text "F" at -277.888,-113.145 h3.81
  text "LAYER STACK TABLE FOR FINISHED BOARD THICKNESSES" at 177.7,-131 h2.5
  text "G" at 309.708,-166.072 h3.81
  text "G" at -278.197,-166.12 h3.81
  text "H" at 309.399,-219.046 h3.81
  text "H" at -278.507,-219.094 h3.81
  text "P" at -213.85,-224.15 h2.33
  text "r" at -212.65,-224.15 h2.33
  text "o" at -211.9,-224.15 h2.33
  text "j" at -210.85,-224.15 h2.33
  text "e" at -210.25,-224.15 h2.33
  text "c" at -209.35,-224.15 h2.33
  text "t" at -208.45,-224.15 h2.33
  text "S" at -207.55,-224.15 h2.33
  text "u" at -206.35,-224.15 h2.33
  text "n" at -205.3,-224.15 h2.33
  text "r" at -204.25,-224.15 h2.33
  text "i" at -203.5,-224.15 h2.33
  text "d" at -202.9,-224.15 h2.33
  text "e" at -202,-224.15 h2.33
  text "Copyright" at 141.207,-224.426 h2.5
  text ".a_CopyrightDate" at 151.707,-224.426 h2.5
  text "Drawing No:" at 173.207,-224.926 h3
  text ".a_PcbPartNo" at 188.707,-224.926 h4
  text "Title:" at 238.207,-224.926 h3
  text ".a_Title" at 245.207,-224.926 h4
  text "T" at -213.25,-226.4 h2.33
  text "h" at -212.05,-226.4 h2.33
  text "e" at -211,-226.4 h2.33
  text "D" at -209.65,-226.4 h2.33
  text "i" at -208.15,-226.4 h2.33
  text "a" at -207.55,-226.4 h2.33
  text "m" at -206.65,-226.4 h2.33
  text "o" at -205,-226.4 h2.33
  text "n" at -203.95,-226.4 h2.33
  text "d" at -202.9,-226.4 h2.33
  text "UNLESS OTHERWISE SPECIFIED / DIMENSONS AND TOLLERANCES ARE IN / mm AND APPLY TO FINISHED PART" at 85.2,-228.6 h1.52
  text "3" at -215.5,-228.8 h2.33
  text "2" at -214.45,-228.8 h2.33
  text "L" at -212.95,-228.8 h2.33
  text "e" at -211.75,-228.8 h2.33
  text "a" at -210.85,-228.8 h2.33
  text "v" at -209.95,-228.8 h2.33
  text "y" at -208.9,-228.8 h2.33
  text "g" at -207.85,-228.8 h2.33
  text "r" at -206.8,-228.8 h2.33
  text "e" at -206.05,-228.8 h2.33
  text "a" at -205.15,-228.8 h2.33
  text "v" at -204.25,-228.8 h2.33
  text "e" at -203.2,-228.8 h2.33
  text "R" at -201.85,-228.8 h2.33
  text "d" at -200.5,-228.8 h2.33
  text "Altium Designer" at 141.207,-229.426 h2.5
  text ".a_AltiumVer" at 157.707,-229.426 h2.5
  text "Changed by:" at 173.207,-229.426 h2.5
  text ".a_PcbRevAuthor" at 186.207,-229.426 h3
  text "Change Date:" at 208.707,-229.426 h2.5
  text ".a_PcbRevDate" at 222.207,-229.426 h2.5
  text "Drill Drawing" at 238.107,-229.951 h4
  text "B" at -216.1,-231.05 h2.33
  text "r" at -214.75,-231.05 h2.33
  text "o" at -214,-231.05 h2.33
  text "o" at -212.95,-231.05 h2.33
  text "m" at -211.9,-231.05 h2.33
  text "h" at -210.25,-231.05 h2.33
  text "a" at -209.2,-231.05 h2.33
  text "l" at -208.3,-231.05 h2.33
  text "l" at -207.7,-231.05 h2.33
  text "," at -207.1,-231.05 h2.33
  text "S" at -206.2,-231.05 h2.33
  text "h" at -205,-231.05 h2.33
  text "e" at -203.95,-231.05 h2.33
  text "f" at -203.05,-231.05 h2.33
  text "f" at -202.3,-231.05 h2.33
  text "i" at -201.55,-231.05 h2.33
  text "e" at -200.95,-231.05 h2.33
  text "l" at -200.2,-231.05 h2.33
  text "d" at -199.75,-231.05 h2.33
  text "TOLLERANCES ON:" at 98.9,-231.3 h1.52
  text "U" at -214.45,-233.3 h2.33
  text "n" at -212.95,-233.3 h2.33
  text "i" at -211.9,-233.3 h2.33
  text "t" at -211.3,-233.3 h2.33
  text "e" at -210.7,-233.3 h2.33
  text "d" at -209.8,-233.3 h2.33
  text "K" at -208.45,-233.3 h2.33
  text "i" at -206.95,-233.3 h2.33
  text "n" at -206.35,-233.3 h2.33
  text "g" at -205.3,-233.3 h2.33
  text "d" at -204.25,-233.3 h2.33
  text "o" at -203.2,-233.3 h2.33
  text "m" at -202.15,-233.3 h2.33
  text "Size A2" at 141.207,-234.426 h2.5
  text "Change Reason:" at 173.207,-234.426 h2.5
  text ".a_PcbRevReason" at 189.707,-234.426 h2.5
  text "Sheet 1 of 1" at 208.707,-234.426 h2.5
  text "S" at -210.7,-235.55 h2.33
  text "3" at -209.5,-235.55 h2.33
  text "7" at -208,-235.55 h2.33
  text "R" at -206.95,-235.55 h2.33
  text "D" at -205.6,-235.55 h2.33
  text "1 PLACE DEC. / +/- 0.15" at 80.2,-236.2 h1.52
  text "ANGLES / +/- 0.5 DEG." at 121.5,-236.2 h1.52
  text "2 PLACE DEC. / +/- 0.05" at 100.9,-236.3 h1.52
  text "THIS DRAWING REMAINS THE PROPERTY OF PROJECT SUNRIDE. / COPYRIGHT FOR ALL PURPOSES IS VESTED IN PROJECT SUNRIDE. / THE REPRODUCTION OF THIS DRAWING IN WHOLE OR IN PART IS PROHIBITED WITHOUT EXPRESS CONSENT IN WRITING. THIS DESIGN IS OFFERED FOR USE ONLY WITH EQUIPMENT MANUFACTURED OR SPECIFICALLY RECOMMENDED BY PROJECT SUNRIDE. RIGHTS ARE RESERVED TO MAKE A CHARGE FOR THE USE OF THIS DESIGN OR ANY PART THEREOF AND SUCH RIGHT SHALL SUBSIST UNLESS AND UNTIL THE SAME SHALL BE EXPRESSLY WAIVED IN WRITING. ACCEPTANCE OF THIS DRAWING WILL BE CONSTRUED AS AN ACCEPTANCE OF THESE CONDITIONS." at -174.3,-239 h1.52
  text "1" at -251.987,-240.911 h3.81
  text "2" at -194.762,-240.911 h3.81
  text "3" at -139.311,-240.911 h3.81
  text "7" at 102.898,-240.911 h3.81
  text "8" at 161.01,-240.911 h3.81
  text "9" at 218.235,-240.911 h3.81
  text "6" at 43.207,-241.152 h3.81
  text "5" at -14.864,-241.283 h3.81
  text "10" at 274.573,-241.354 h3.81
  text "4" at -74.988,-241.798 h3.81

## Text inside footprints (layer, text, board x,y; h text height)
J1A: Top Overlay "1" at 4.55,48.59 h0.7 r90; Top Overlay "3" at 4.55,61.59 h0.7 r90
J1B: Top Overlay "1" at 4.55,36.05 h0.7 r90; Top Overlay "3" at 4.55,49.05 h0.7 r90
J1C: Top Overlay "1" at 25.45,61.95 h0.7 r270; Top Overlay "3" at 25.45,48.95 h0.7 r270
J1D: Top Overlay "1" at 25.45,49.41 h0.7 r270; Top Overlay "3" at 25.45,36.41 h0.7 r270
J2: Top Overlay "6" at 22.8,3.15 h0.7 r180; Top Overlay "1" at 7.5,3.15 h0.7 r180
J3A: Top Overlay "2" at 4.55,27.55 h0.7 r90; Top Overlay "1" at 4.55,18.55 h0.7 r90
J3B: Top Overlay "1" at 4.55,27.09 h0.7 r90; Top Overlay "2" at 4.55,36.09 h0.7 r90
J3C: Top Overlay "1" at 25.45,28.2 h0.7 r270; Top Overlay "2" at 25.45,19.2 h0.7 r270
J3D: Top Overlay "1" at 25.45,36.66 h0.7 r270; Top Overlay "2" at 25.45,27.66 h0.7 r270
J7A: Top Overlay "4" at 20.8,21.65 h0.7 r180; Top Overlay "1" at 9.6,21.65 h0.7 r180
J7B: Top Overlay "1" at 9.6,47.9 h0.7 r180; Top Overlay "4" at 20.8,47.9 h0.7 r180